# Altium PCB PoHalf-Small.PcbDoc (part 2 of 2)
Units mil, origin at the board's own origin, x right, y up, seen from the top; angles counter-clockwise.
Board outline 2900 x 4650 mil, 2 copper layers (Top Layer, Bottom Layer), stack 33.512 mil thick; 148 components, 103 nets, 556 pads, 176 vias.
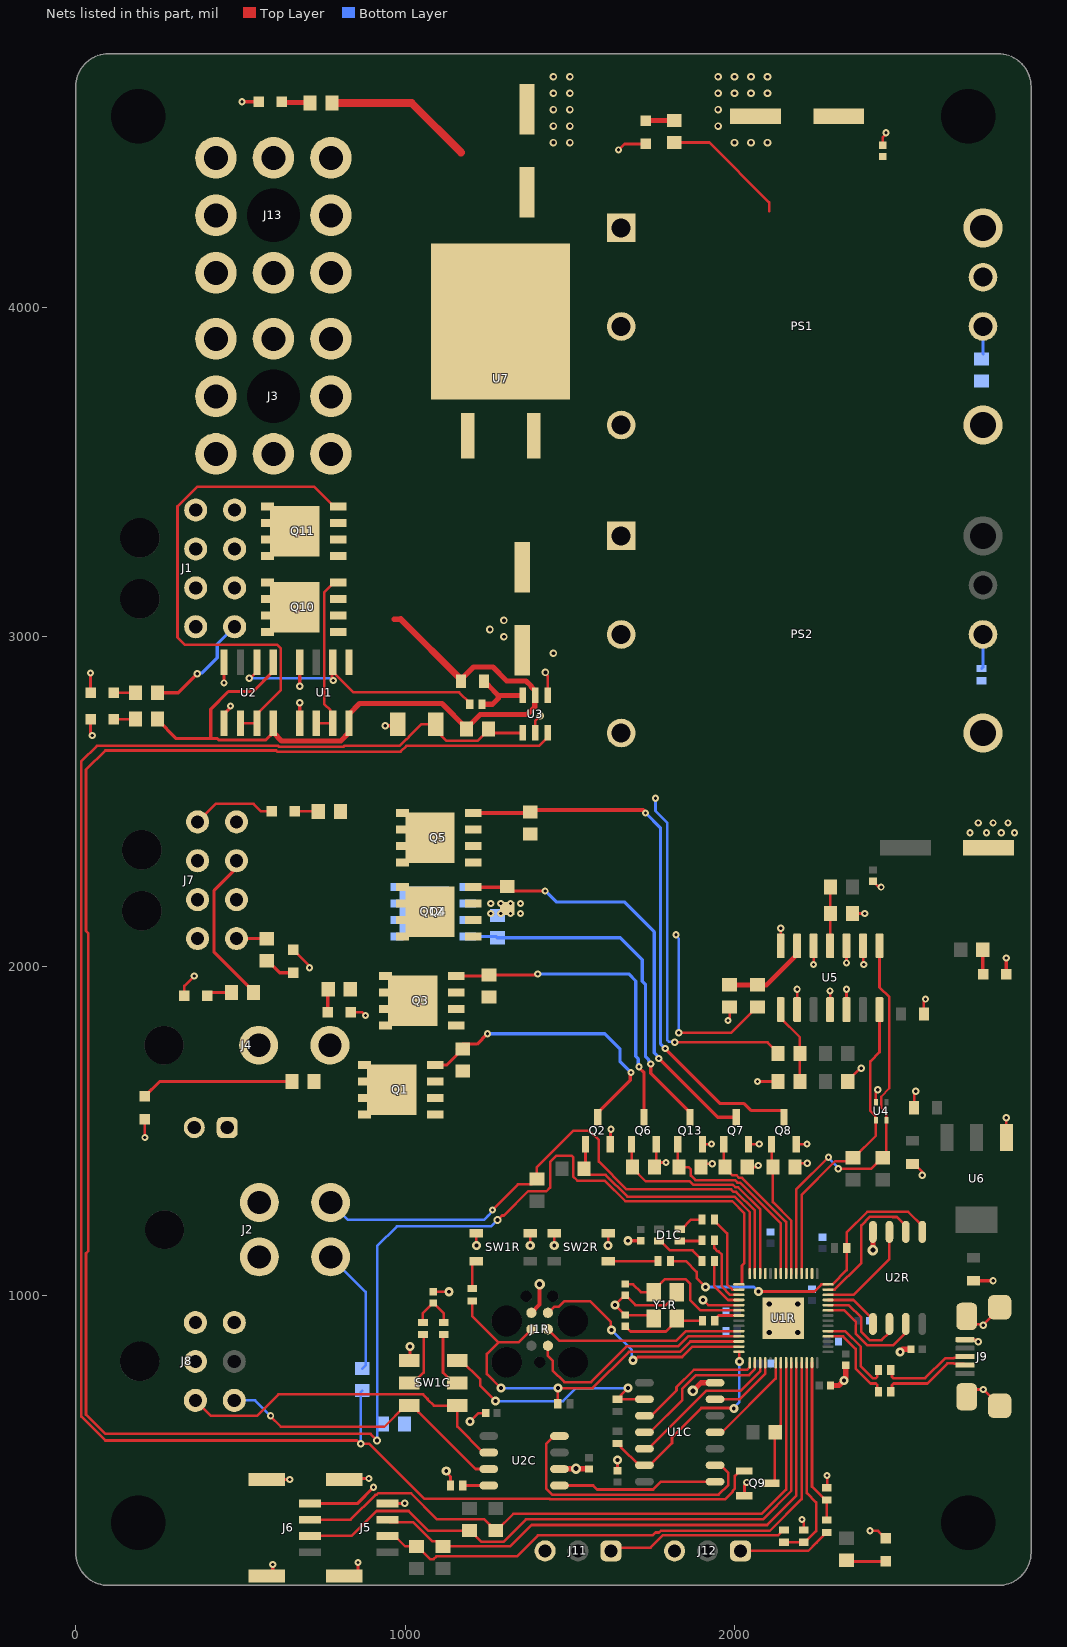
[diagram p2: the nets of this part, all layers, seen from the top]

## Via types
v1: diameter 22, hole 10, Top Layer to Bottom Layer, tented both sides, 85 vias
v2: diameter 27.56, hole 11.81, Top Layer to Bottom Layer, tented both sides, 35 vias
v3: diameter 23, hole 12, Top Layer to Bottom Layer, tented both sides, 28 vias
v4: diameter 31.5, hole 15.75, Top Layer to Bottom Layer, tented both sides, 12 vias
v5: diameter 22.1, hole 10, Top Layer to Bottom Layer, 8 vias
v6: diameter 45.28, hole 27.56, Top Layer to Bottom Layer, tented both sides, 6 vias
v7: diameter 24, hole 12, Top Layer to Bottom Layer, tented both sides, 2 vias

## Nets (pads, with @x,y where several pads share a name; then routed paths per layer and width w, separated by ;. In a path a pad name is that pad's centre, name@x,y a point inside that pad or via, vN(x,y) a via of type N, cw(c..) or ccw(c..) an arc to the next point about the centre after c; other vN are vias at no path point) (continued)
5V_MEAS: R26.2 R30.1 U5.11 | length 179
  Top Layer w7.87: U5.11@2290,2061.65 2290,2238.5 R26.2@2291.5,2240
12V: C7.1 C8.1 J8.6 J10.1 PS1.7 PS1.8 Q1.1 Q1.2 Q1.3 Q3.1 Q3.2 Q3.3 Q4.1 Q4.2 Q4.3 Q5.1 Q5.2 Q5.3 Q12.1 Q12.2 Q12.3 R2.1 R12.1 R13.1 R14.1 R25.1 R44.1 R46.1 | length 963.2
  Top Layer w7.87: R46.1@1817,4500.5 1923.5,4500.5 2105,4319 2105,4292 ; v1(1830.68,1797.83) 1988.83,1797.83 2067.5,1876.5 R25.1@2070,1876.5
  Bottom Layer w7.87: v1(1822.5,2095.55) 1822.5,2091.73 1830.68,2083.54 v1(1830.68,1797.83)
  other v5: 1260,2160 1290,2160 1320,2160 1350,2160 1260,2190 1290,2190 1320,2190 1350,2190
12V_MEAS: R25.2 R29.1 U5.13 | length 268.9
  Top Layer w15: R29.1@1985,1943.5 R25.2@2070,1943.5 2097.44,1943.5 2190,2036.06 U5.13@2190,2061.65
ADC0: DNP1.1 R41.2 U1R.40 | length 634.9
  Top Layer w7.87: R41.2@2150,251.3 DNP1.1@2210,251.3 2213.94,251.3 2248,285.36 2248,372 2219.45,400.55 U1R.40@2219.45,796.28
ADC1: DNP2.1 R42.2 U1R.41 | length 493
  Top Layer w7.87: U1R.41@2235.2,796.28 2235.2,420.31 2276.06,379.45 DNP2.1@2280,379.45 ; R42.2@2279.46,319.25 DNP2.1@2279.46,374.55
AUX_SWITCH: J2.4 R38.2 U1R.13 | length 1775.1
  Top Layer w7.87: v1(1265,1260) 1342.52,1337.52 1384.02,1337.52 R38.2@1400,1353.5 1400,1390 1510,1500 1556.75,1500 1562.51,1494.24 1565.73,1494.24 1588,1471.97 1588,1407 1672.76,1322.24 1989.15,1322.24 1996.65,1314.74 2005.08,1314.74 2061.97,1257.86 U1R.13@2061.97,1066.95
  Bottom Layer w7.87: J2.4@773.94,1282.68 826.42,1230.19 1240.19,1230.19 1251.16,1241.16 1251.16,1242.34 1265,1256.18 v1(1265,1260)
CANCLK_RP2CAN: U1C.6 U1R.32 | length 217.8
  Top Layer w7.87: U1C.6@1940.91,685.16 2015.2,685.16 2093.46,763.42 U1R.32@2093.46,796.28
CANH: J8.4 SW1C.4 U2C.7 | length 932.2
  Top Layer w7.87: v1@590,635 623.11,601.89 936.97,601.89 1000.94,665.87 SW1C.4@1012.76,665.87 1024.57,665.87 1040.32,650.12 1040.32,646.77 1213.54,473.54 U2C.7@1253.9,473.54 U2C.7@1270.63,473.54
  Bottom Layer w7.87: J8.4@481.41,681.89 544.79,681.89 v1(591.68,635)
CANL: J8.1 SW1C.1 U2C.6 | length 1065.1
  Top Layer w8: J8.1@363.29,681.89 410.17,635.02 550.02,635.02 615,700 1054.84,700 1068,686.84 1068,685 1087.13,665.87 SW1C.1@1158.43,665.87 1158.43,602.28 1237.17,523.54 U2C.6@1253.9,523.54 U2C.6@1270.63,523.54
CANRX_RP2CAN: U1C.2 U2C.4 | length 845.6
  Top Layer w7.87: U2C.4@1468.46,573.54 1451.73,573.54 1428.11,549.92 1428.11,413.76 1446.28,395.59 1951.48,395.59 1981.26,425.37 1981.26,461.54 1957.64,485.16 U1C.2@1940.91,485.16
CANTX_RP2CAN: U1C.1 U2C.1 | length 487.4
  Top Layer w7.87: U2C.1@1468.46,423.54 1570.81,423.54 1583.01,411.34 1752.66,411.34 1776.48,435.16 U1C.1@1940.91,435.16
DBG_TX_RP2040: J1R.5 U1R.27 | length 714.8
  Top Layer w7.87: J1R.5@1433.43,947.76 1434.92,947.76 1453.49,966.32 1466.52,966.32 1483.39,983.19 1561.57,983.19 1623.78,920.98 1623.78,898.96 v2(1626.93,895.81) ; v2(1691.89,803.66) 1696.5,803.66 1706.34,813.5 1840.76,813.5 1872.26,845 U1R.27@2013.25,845
  Bottom Layer w7.87: v2(1626.93,895.81) 1688.16,834.58 1688.16,807.39 v2(1691.89,803.66)
GND: C1.2 C1C.2 C1R.2 C2.2 C2C.1 C2R.2 C3.2 C3C.2 C3R.2 C4.2 C4C.2 C4R.2 C5.2 C5C.2 C5R.2 C6.2 C6R.2 C7.2 C7R.2 C8.2 C8R.2 C9.2 C9R.2 C10.2 C10R.2 C11.2 C11R.2 C12R.2 C13R.2 D1.2 D2.2 D3.2 D4.2 D5.2 D6.2 D7.2 D8.2 D9.2 D10.2 D11.2 DNP1.2 DNP2.2 J1.1 J1.2 J1.3 J1.4 J1R.6 J2.1 J2.2 J4.1 J5.4 J5.S1 J5.S2 J6.4 J6.S1 J6.S2 J7.1 J7.2 J7.3 J7.4 J8.2 J9.5 J9.6 J9.7 J9.8 J9.9 J10.2 J11.3 J12.3 J13.1 PS1.2 PS1.3 PS1.4 PS2.2 PS2.3 PS2.4 Q2.2 Q6.2 Q7.2 Q8.2 Q9.2 Q13.2 R6C.2 R15.2 R16.2 R17.2 R19.1 R28.2 R29.2 R30.2 R31.2 R39.2 R40.2 R45.2 SW1C.6 SW1R.B1 SW1R.B2 SW2R.B1 SW2R.B2 U1.4 U1.5 U1C.7 U1R.19 U1R.57 U2.4 U2.5 U2C.2 U2R.4 U3.2 U3.4 U4.4 U5.2 U5.4 U5.5 U5.9 U5.10 U5.12 U5.14 U6.1 Y1R.2 Y1R.4 | length 5001.6
  Top Layer w7.87: D5.2@45,2750 45,2708.82 50,2703.82 v1(50,2700) ; v1(210,1480) D1.2@210,1535 ; D8.2@330,1910 330,1940 v1(360,1970) ; J7.4@370,2438.11 424.89,2493 540,2493 563,2470 D9.2@595,2470 ; D10.2@660,2050 710,2000 v1@710,1990 ; D7.2@835,1860 870,1860 v1(880,1850) ; SW1C.6@1012.76,803.66 1014.72,805.63 v2(1014.72,845) ; C2C.1@1085.59,1011.73 v2(1132.83,1011.73) ; v2(1124.96,467.05) 1124.96,462.91 1137.76,450.12 R6C.2@1137.76,423.54 ; v2(1196.45,617.27) 1222.14,642.96 1244.02,642.96 C3C.2@1244.49,643.43 ; v2(1216.5,1152.09) SW1R.B2@1216.5,1189.49 ; v2(1379.88,1152.09) 1379.88,1185.63 SW1R.B1@1380,1185.75 ; U3.2@1395,2708 1395,2745 v1(1410,2760) ; v3(1426,2892) 1426,2887.91 1432.4,2881.51 U3.4@1432.4,2822 ; v2(1452.72,1152.09) SW2R.B2@1452.72,1189.49 ; v2(1616.1,1152.09) SW2R.B1@1616.1,1189.49 ; v1(1648,4478) 1666,4496 D11.2@1730,4496 ; R15.2@1757,1390 R15.2@1762.5,1395.5 ; Q6.2@1762.5,1459 R15.2@1762.5,1395.5 ; v1(1792,1404) 1771,1404 R15.2@1762.5,1395.5 ; R45.2@1898.5,1390 1908.5,1400 v1(1932.63,1400) ; Q13.2@1902.5,1459 1929,1459 v1(1930,1460) ; v2(1904.49,986.73) 1920.24,970.98 U1R.19@2013.25,970.98 ; v1(1980,1835) 1980,1838.28 1985,1843.28 R29.2@1985,1876.5 ; R16.2@2028.5,1390 2063.18,1390 2068.18,1395 v1(2072,1395) ; Q7.2@2042.5,1459 2043.5,1460 v1(2075,1460) ; v1(2070,1650) R28.2@2131.5,1650 ; U1R.57@2101.34,970.98 v4(2105.28,974.92) ; U5.14@2140,2061.65 v1(2140,2115) ; R17.2@2173.5,1390 2185.5,1402 v1(2221,1402) ; Q8.2@2182.5,1459 2219,1459 v1(2220,1460) ; U5.2@2190,1868.35 v1(2190,1930) ; v1(2205,320) 2210,315 DNP1.2@2210,288.7 ; v1(2240,2005) U5.12@2240,2061.65 ; DNP2.2@2280,416.85 2281,417.85 v1(2281,454) ; U5.4@2290,1868.35 v1(2290,1925) ; U5.5@2340,1868.35 v1(2340,1930) ; v1(2340,2010) U5.10@2340,2061.65 ; R31.2@2343.5,1650 2343.5,1652.5 2381,1690 v1(2385,1690) ; R30.2@2358.5,2160 v1(2395,2160) ; U5.9@2390,2061.65 2391.06,2060.59 2391.06,2006.06 v1(2392.13,2005) ; v1(2411,286) 2436,286 D3.2@2459,263 ; C11.2@2420,2257.87 2420.79,2257.87 2427.87,2250.79 2427.87,2250 2435.17,2242.7 2442.3,2242.7 v1(2445,2240) ; U4.4@2429.25,1587.56 2429.25,1615.97 2435,1621.72 v1(2435,1625) ; C8.2@2450,4492.13 2450,4516.85 2460,4526.85 v1(2460,4530) ; C2.2@2540,1400 2545,1400 2570,1375 v1(2570,1365) ; C4.2@2545,1570 2545,1611.72 2550,1616.72 v1(2550,1620) ; C3.2@2575,1855 2575,1891.72 2580,1896.72 v1(2580,1900) ; J9.5@2699.68,866.18 2733.82,866.18 v1(2740,860) ; J9.6@2704.61,692.95 2726.46,714.8 2754.8,714.8 v1(2755,715) 2756.18,715 2805,666.18 J9.9@2805,665.39 ; J9.7@2704.61,937.05 2728.96,912.7 2752.3,912.7 v1(2755,910) 2755,911.32 2805,961.32 J9.8@2805,964.61 ; v1(2825,1540) 2825,1480.55 U6.1@2825.55,1480
  Top Layer w8: SW1R.B1@1377.32,1188.43 SW1R.B1@1380,1185.75 ; v2(1636.77,970.98) v2@1637.36,970.98 ; C1C.2@1644.65,466.3 C1C.2@1644.65,468.43 v2(1644.65,501.3) ; Y1R.2@1754.88,930.35 1744.37,940.87 C2R.2@1668.27,940.87 1667.48,940.87 v2@1637.36,970.98 ; Y1R.4@1824.88,1010.35 1824.88,1004.45 1791.35,970.92 1699.24,970.92 1669.06,1001.1 C1R.2@1668.27,1001.1 1667.48,1001.1 v2@1637.36,970.98
  Top Layer w9.84: v2(1676.14,1166.46) C5C.2@1715.51,1166.46
  Top Layer w10: v1(45,2890) D6.2@45,2830 D6.2@46,2831 ; U2.5@450,2737 450,2765 467.7,2782.7 467.7,2787.7 v1(470,2790) ; v1(450,2860) U2.4@450,2923 ; v1(505,4624) D2.2@555,4624 ; J6.S2@580,148.35 583.31,148.35 598,163.03 v1(598,184) ; J6.S1@580,441.65 580.35,442 v1(650,442) ; U1.5@680,2737 v1(680,2800) ; v1(680,2850) U1.4@680,2923 ; J6.4@711.89,368.82 854.82,368.82 v1(904,418) ; J5.S2@815,148.35 842.31,148.35 857,163.03 v1(857,190) ; J5.S1@815,441.65 818.35,445 v1(890,445) ; v1(940,2730) 972.52,2730 C1.2@977.52,2735 C1.2@982.52,2740 ; J5.4@946.89,368.82 997.82,368.82 v1(999,370) ; Q2.2@1622.5,1459 1623.75,1460.25 1623.75,1503.75 v1(1625,1505) ; Q9.2@2030,392.5 2030,422.75 2037,429.75 v1(2037,433) ; C5.2@2725,1045 v1(2785,1045) ; D4.2@2825,1975 v1(2825,2025)
  Top Layer w11.81: J1R.6@1383.43,947.76 1408.34,972.67 v4(1408.34,1034.3)
  Top Layer w15.75: U2C.2@1468.46,473.54 1469.15,474.23 1517.97,474.23 v4(1518.66,474.92) 1519.35,474.23 1557.34,474.23 C4C.2@1558.03,473.54 ; v4(1873.52,710.61) 1898.07,735.16 U1C.7@1940.91,735.16 ; C10R.2@2291.69,726.89 2291.92,726.66 2316.66,726.66 v2(2332.64,742.64) 2332.64,745.83 2337.56,750.76 C4R.2@2337.56,788.5 ; v4(2420.04,1138.21) U2R.4@2420.04,1193.48 ; v2(2502.91,829.25) 2510.79,837.13 C3R.2@2535.79,837.13
  other v1: 710,1995 2715,2405 2765,2405 2810,2405 2850,2405 2740,2435 2785,2435 2830,2435
  other v3: 1450,2950 1300,3000 1257,3022 1300,3050 1450,4500 1500,4500 2000,4500 2050,4500 2100,4500 1450,4550 1500,4550 1950,4550 1450,4600 1500,4600 1950,4600 1450,4650 1500,4650 1950,4650 2000,4650 2050,4650 2100,4650 1450,4700 1500,4700 1950,4700 2000,4700 2050,4700 2100,4700
  other v4: 2105.28,888.31 2191.89,888.31 2191.89,974.92
INT_RP2CAN: U1C.4 U1R.34 | length 297.2
  Top Layer w7.87: U1C.4@1940.91,585.16 1961.9,585.16 2124.96,748.22 U1R.34@2124.96,793.82
KILL_FEEDBACK: Q9.3 R18.2 U1R.35 | length 378.2
  Top Layer w7.87: Q9.3@2112,430 2122,440 2122,589.42 2140.71,608.13 U1R.35@2140.71,796.28
KILL_SWITCH: J2.3 R23.2 | length 386.9
  Bottom Layer w7.87: J2.3@773.94,1117.32 880,1011.26 880,788.5 R23.2@870,778.5
LEDB_RP2CAN: R8C.1 U1R.18 | length 168.1
  Top Layer w7.87: R8C.1@1938.94,1104.84 1938.94,1028.19 1980.39,986.73 U1R.18@2013.25,986.73
LEDG_RP2CAN: R7C.1 U1R.17 | length 213.3
  Top Layer w7.87: R7C.1@1938.94,1167.83 1938.94,1144.21 1948.79,1134.36 1951.72,1134.36 1961.57,1124.5 1961.57,1027.82 1986.91,1002.48 U1R.17@2013.25,1002.48
LEDR_RP2CAN: R5C.1 U1R.16 | length 255
  Top Layer w7.87: R5C.1@1938.94,1230.83 1938.94,1226.89 1977.32,1188.5 1977.32,1034.34 1993.44,1018.23 U1R.16@2013.25,1018.23
MISO_RP2CAN: U1C.12 U1R.31 | length 475
  Top Layer w7.87: U1C.12@1726.34,535.16 1738.81,535.16 1915.19,711.54 2019.31,711.54 2077.72,769.95 U1R.31@2077.72,796.28
MOSI_RP2CAN: U1C.11 U1R.30 | length 454.6
  Top Layer w7.87: U1C.11@1726.34,585.16 1743.07,585.16 1841.5,683.58 1841.5,717.56 1882.71,758.78 2044.28,758.78 2061.97,776.47 U1R.30@2061.97,796.28
MOTOR_EN: R20.1 R21.2 U3.6 | length 204.1
  Top Layer w15.75: R21.2@1233.7,2795 1265,2795 1283,2813 1283,2822 ; R20.1@1240,2865 1240,2860 1247.13,2852.87 1252.13,2852.87 1283,2822 ; U3.6@1357.6,2822 1283,2822
mOTOR_PWR: J1.5 J1.6 J1.7 J1.8 Q10.D Q11.D R8.1 | length 341.5
  Top Layer w10: R8.1@248.5,2830 311,2830 v1(369,2888)
  Bottom Layer w10: v1(369,2888) 371.3,2890.3 384.3,2890.3 430.06,2936.06 430.06,2978.01 J1.5@482.41,3030.35
nCS_RP2CAN: R4C.2 U1C.13 U1R.28 | length 646.2
  Top Layer w7.87: R4C.2@1644.65,550.71 1648.58,550.71 1655.47,543.82 1655.47,539.29 1709.61,485.16 U1C.13@1726.34,485.16 1743.07,485.16 1810.26,552.35 1810.26,569.67 1899.37,658.78 1996.22,658.78 v2(1997.78,657.22) ; U1R.28@2013.25,829.25 2014.72,829.25 v2(2014.72,800.12)
  Bottom Layer w7.87: v2(1997.78,657.22) 1997.78,659.52 2014.72,676.47 v2(2014.72,800.12)
NetC1_1: C1.1 Q9.1 R22.2 R23.1 U3.1 | length 5784.6
  Top Layer w7.87: C1.1@1072.8,2703.11 1089.98,2720.3 C1.1@1092.48,2722.8 ; C1.1@1092.48,2717.8 1126.28,2684 1220,2684 1253.5,2717.5 R22.2@1253.5,2720 1265.5,2708 U3.1@1357.6,2708 ; C1.1@1092.48,2735 1049.61,2735 1011.38,2696.77 1011.38,2694.93 1005.38,2688.94 1003.54,2688.94 983.61,2669 815.61,2669 812.33,2665.72 617.67,2665.72 614.39,2669 64,2669 17.24,2622.24 17.24,632.71 89.96,560 853.32,560 863.32,550 891.33,550 1058.33,383 1167.52,383 1168.26,383.74 1438.09,383.74 1440.41,381.42 1971.42,381.42 1994.76,404.76 1994.76,407.74 2000.76,413.74 2000.76,452.26 2016,467.5 Q9.1@2030,467.5
  Bottom Layer w7.87: v1(865,550) 865,706.5 R23.1@870,711.5
NetC2C_2: C2C.2 R2C.2 R3C.2 | length 144.3
  Top Layer w7.87: R3C.2@1054.09,918.82 1054.09,946.77 1084.8,977.48 C2C.2@1085.59,977.48 1086.38,977.48 1117.09,946.77 R2C.2@1117.09,918.82
NetC2R_1: C2R.1 R1R.2 Y1R.3 | length 263.4
  Top Layer w8: C2R.1@1668.27,906.61 1669.06,906.61 1684.75,890.92 1791.35,890.92 1824.88,924.45 Y1R.3@1824.88,930.35 1831.5,923.74 R1R.2@1902.6,923.74
NetD1_1: D1.1 R1.1 | length 465.1
  Top Layer w9.84: D1.1@210,1605 255,1650 R1.1@656.5,1650
NetD1C_1: D1C.1 R5C.2 | length 80.1
  Top Layer w7.87: D1C.1@1833.62,1201.3 1838.54,1201.3 1868.07,1230.83 R5C.2@1901.54,1230.83
NetD1C_2: D1C.2 R7C.2 | length 68.7
  Top Layer w7.87: D1C.2@1833.62,1165.87 1899.57,1165.87 R7C.2@1901.54,1167.83
NetD1C_3: D1C.3 R8C.2 | length 158.5
  Top Layer w7.87: D1C.3@1770.63,1165.87 1775.55,1165.87 1804.09,1137.32 1872.99,1137.32 1901.54,1108.78 R8C.2@1901.54,1104.84
NetD2_1: D2.1 R4.2 | length 82.5
  Top Layer w16: D2.1@627,4622 R4.2@709.5,4622
NetD3_1: D3.1 R3.1 | length 120.4
  Top Layer w9.84: R3.1@2340,196.5 2343.5,193 D3.1@2459,193
NetD4_1: D4.1 R6.2 | length 75.6
  Top Layer w9.84: R6.2@2753.5,2050 2753.5,1976.5 D4.1@2755,1975
NetD5_1: D5.1 R7.2 | length 66.5
  Top Layer w7.87: D5.1@115,2750 R7.2@181.5,2750
NetD6_1: D6.1 R8.2 | length 66.5
  Top Layer w7.87: D6.1@115,2830 R8.2@181.5,2830
NetD7_1: D7.1 R9.1 | length 70.6
  Top Layer w10: D7.1@765,1860 765,1928.5 R9.1@766.5,1930
NetD8_1: D8.1 R10.1 | length 77.1
  Top Layer w10: D8.1@400,1910 410,1920 R10.1@473,1920
NetD9_1: D9.1 R11.1 | length 71.5
  Top Layer w7.87: D9.1@665,2470 R11.1@736.5,2470
NetD10_1: D10.1 R43.1 | length 95.1
  Top Layer w10: R43.1@580,2016.5 582.5,2016.5 619,1980 D10.1@660,1980
NetD11_1: D11.1 R46.2 | length 87.6
  Top Layer w15: D11.1@1730,4566 1730.75,4566.75 1816.25,4566.75 R46.2@1817,4567.5
NetPS1_6: PS1.6 R39.1 | length 103.8
  Bottom Layer w7.87: PS1.6@2754.21,3961.97 2754.21,3859.29 R39.1@2755,3858.5
NetPS2_6: PS2.6 R40.1 | length 125
  Bottom Layer w7.87: R40.1@2750,2903.7 2754.21,2907.91 PS2.6@2754.21,3026.97
NetQ1_4: Q1.4 Q2.3 R2.2 | length 911.5
  Top Layer w10: Q1.4@1099,1707 Q1.4@1092,1700 1126.5,1700 1157.5,1731 1157.5,1733.5 1172.5,1748.5 R2.2@1175,1748.5 ; R2.2@1157.5,1748.5 1160,1748.5 1175,1763.5 1218.5,1763.5 v1(1250,1795) ; Q2.3@1585,1541 1585,1555 1683.7,1653.7 1683.7,1674.7 v1(1686,1677)
  Bottom Layer w10: v1(1250,1795) 1606.54,1795 1652.12,1749.42 1652.12,1710.88 v1(1686,1677)
NetQ3_4: Q3.4 Q6.3 R12.2 | length 981.1
  Top Layer w10: Q3.4@1155,1970 1251.5,1970 R12.2@1255,1973.5 1392.86,1973.5 1393.89,1974.53 1400.96,1974.53 v1(1402.87,1976.44) ; v1(1710,1695) 1710,1691.75 1725.29,1676.46 1725.29,1541.29 Q6.3@1725,1541
  Bottom Layer w10: v1(1402.87,1976.44) 1678.56,1976.44 1700,1955 1700,1726 1707.7,1718.3 1707.7,1697.3 v1(1710,1695)
NetQ4_4: Q4.4 Q7.3 R13.2 | length 1305.4
  Top Layer w10: Q4.4@1207.5,2240 1308,2240 R13.2@1310,2242 1323.5,2228.5 v1(1425,2228.5) ; v1(1770,1720) 1949,1541 Q7.3@2005,1541
  Bottom Layer w10: v1(1425,2228.5) 1458.5,2195 1665,2195 1756.13,2103.87 1756.13,1737.12 1770,1723.25 v1(1770,1720)
NetQ5_4: Q5.4 Q8.3 R14.2 | length 1722.1
  Top Layer w10: v1(1790,1750) 1957,1583 2029,1583 2049.94,1562.06 2142.94,1562.06 2150,1555 Q8.3@2150,1541
  Top Layer w12: Q5.4@1207.5,2465 1376.5,2465 R14.2@1380,2468.5 ; R14.2@1380,2473.5 1721.5,2473.5 v1(1730,2465)
  Bottom Layer w10: v1(1730,2465) 1775,2420 1775,1765 v1(1790,1750)
NetQ10_4: Q10.4 U1.6 U1.7 | length 513.6
  Top Layer w7.87: U1.6@730,2737 U1.7@780,2737 772.94,2744.06 772.94,2777.06 755,2795 755,3135.5 784.5,3165 Q10.4@797.5,3165
NetQ11_4: Q11.4 U2.6 U2.7 | length 1571.2
  Top Layer w7.87: U2.6@500,2737 U2.7@550,2737 550,2765 623,2838 623,2964.48 611.48,2976 331,2976 309,2998 309,3395.59 368.41,3455 724.5,3455 784.5,3395 Q11.4@797.5,3395
NetQ12_4: Q12.4 Q13.3 R44.2 | length 1098.1
  Top Layer w10: v1(1745.31,1703.19) 1745.31,1674.69 1865,1555 Q13.3@1865,1541
  Bottom Layer w10: Q12.4@1190,2090 1276.5,2090 R44.2@1280,2086.5 1653.5,2086.5 1720,2020 1720,1954.15 1730,1944.15 1730,1724.81 1739.4,1715.41 1739.4,1712.34 1745.31,1706.43 v1(1745.31,1703.19)
NetR2C_1: R2C.1 SW1C.2 | length 172.3
  Top Layer w7.87: R2C.1@1117.09,881.42 1115.12,879.45 1115.12,766.26 1146.61,734.76 SW1C.2@1158.43,734.76
NetR3C_1: R3C.1 SW1C.5 | length 172.3
  Top Layer w7.87: SW1C.5@1012.76,734.76 1024.57,734.76 1056.06,766.26 1056.06,879.45 R3C.1@1054.09,881.42
NetR6C_1: R6C.1 U2C.8 | length 78.7
  Top Layer w7.87: R6C.1@1175.16,423.54 U2C.8@1253.9,423.54
NetR6R_1: R6R.1 SW1R.A2 | length 91.3
  Top Layer w7.87: R6R.1@1203.7,1021.18 1203.7,1095.98 1212.56,1104.84 SW1R.A2@1216.5,1104.84
NetR7R_1: R7R.1 SW2R.A1 | length 151.6
  Top Layer w7.87: SW2R.A1@1616.1,1104.84 R7R.1@1767.68,1104.84
NetR21_1: R21.1 U1.2 U2.2 | length 836.3
  Top Layer w7.87: v1(526.88,2873.79) 528.79,2873.79 550,2895 U2.2@550,2923 ; U1.2@780,2923 U1.2@780,2895 ; v1(782,2867) 782,2870.73 778.04,2874.69 778.04,2893.04 U1.2@780,2895 ; R21.1@1196.3,2795 1196.3,2798.94 1164.24,2831 844,2831 U1.2@780,2895
  Bottom Layer w7.87: v1(526.88,2873.79) 771.38,2873.79 778.18,2867 v1(782,2867)
NetU1R_2: U1R.2
NetU1R_3: U1R.3
NetU1R_9: U1R.9
NetU1R_11: U1R.11
Orin_PWR: J4.2 Q1.D R1.2
Orin_SW: Q2.1 R5.2 U1R.14 | length 815.2
  Top Layer w7.87: R5.2@1543.5,1385 1543.5,1382.5 1559.56,1366.44 1608.52,1366.44 1674.39,1300.57 1999.21,1300.57 2046.22,1253.56 U1R.14@2046.22,1066.95
  Top Layer w10: R5.2@1547.5,1389 Q2.1@1547.5,1459
Pump_PWR: J7.5 Q12.D R43.2 | length 92
  Top Layer w10: J7.5@488.11,2083.78 579.72,2083.78 R43.2@580,2083.5
Pump_SW: Q13.1 R45.1 U1R.8 | length 613.8
  Top Layer w7.87: Q13.1@1827.5,1459 1827.5,1394 R45.1@1831.5,1390 1860.16,1390 1867.21,1382.95 1867.21,1364.31 1880.93,1350.59 2000.89,1350.59 2008.39,1343.09 2016.82,1343.09 2140.71,1219.2 U1R.8@2140.71,1066.95
QSPI_SCLK_RP2040: U1R.52 U2R.6 | length 286.6
  Top Layer w7.87: U1R.52@2283.92,970.98 2346.61,970.98 2384.8,932.8 2384.8,890.14 2410.25,864.69 2446.42,864.69 2470.04,888.31 U2R.6@2470.04,909.96
QSPI_SD0_RP2040: U1R.53 U2R.5 | length 178.4
  Top Layer w7.87: U1R.53@2283.92,986.73 2361.18,986.73 2420.04,927.87 U2R.5@2420.04,909.96
QSPI_SD1_RP2040: U1R.55 U2R.2 | length 427.3
  Top Layer w7.87: U1R.55@2283.92,1018.23 2303.73,1018.23 2384.8,1099.3 2384.8,1213.31 2410.25,1238.76 2479.82,1238.76 2479.88,1238.7 2492.48,1238.7 2520.04,1211.14 U2R.2@2520.04,1189.49
QSPI_SD2_RP2040: U1R.54 U2R.3 | length 309.4
  Top Layer w7.87: U1R.54@2283.92,1002.48 2361.18,1002.48 2470.04,1111.34 U2R.3@2470.04,1189.49
QSPI_SD3_RP2040: U1R.51 U2R.7 | length 339.2
  Top Layer w7.87: U1R.51@2283.92,955.24 2333.4,955.24 2368.56,920.07 2368.56,884.11 2403.73,848.94 2480.67,848.94 2520.04,888.31 U2R.7@2520.04,909.96
QSPI_SS_RP2040: R5R.2 R7R.2 U1R.56 U2R.1 | length 1007.5
  Top Layer w7.87: R7R.2@1805.08,1104.84 1852.03,1104.84 1885.24,1071.64 1885.24,1053.23 v2(1912.36,1026.1) ; v2(2073.14,1012.32) 2242.45,1012.32 2264.11,1033.98 U1R.56@2283.92,1033.98 ; U1R.56@2297.2,1033.98 2340.51,1077.28 R5R.2@2340.51,1144.21 2340.51,1191.29 2403.73,1254.51 2526.68,1254.51 2570.04,1211.14 U2R.1@2570.04,1189.49
  Bottom Layer w7.87: v2(1912.36,1026.1) 2058.69,1026.1 2072.46,1012.32 v2(2073.14,1012.32)
RUN_RP2040: J1R.4 R4R.2 R6R.2 U1R.26 | length 1275.3
  Top Layer w7.87: R6R.2@1203.7,983.78 1203.7,937.88 1283.39,858.19 ; v2(1291.64,719.02) 1290.31,719.02 1247.99,761.34 1247.99,822.79 1283.39,858.19 ; J1R.4@1383.43,897.76 1343.86,858.19 1283.39,858.19 ; R4R.2@1463.54,671.77 v2(1463.54,719.02) 1569.09,719.02 1679.32,829.25 1834.24,829.25 1865.73,860.75 U1R.26@2013.25,860.75
  Bottom Layer w7.87: v2(1291.64,719.02) v2(1463.54,719.02)
SCK_RP2CAN: U1C.10 U1R.29 | length 400.1
  Top Layer w7.87: U1C.10@1726.34,635.16 1746.58,635.16 1823.96,712.53 1823.96,722.29 1876.19,774.53 2037.76,774.53 2046.22,782.99 U1R.29@2046.22,796.28
SCL_0_1: J6.2 R33.2 U1R.37 | length 1983.4
  Top Layer w7.87: J6.2@711.89,270.39 837.93,270.39 913.53,346 1010.51,346 1070.01,286.5 R33.2@1195,286.5 1197.5,286.5 1231.33,252.67 1298.15,252.67 1366.48,321 2086.04,321 2172.2,407.16 U1R.37@2172.2,796.28
SCL_1: J5.2 R35.2 U1R.39 | length 1775.2
  Top Layer w7.87: J5.2@946.89,270.39 968.54,270.39 1000.44,238.5 R35.2@1035,238.5 1037.5,238.5 1075.76,200.24 1086.76,200.24 1094.79,208.26 1339.26,208.26 1403,272 1751.59,272 1760.3,280.7 1770.66,280.7 1776.13,286.17 2107.41,286.17 2203.7,382.47 U1R.39@2203.7,796.28
SCL_1_0: R37.2 U1R.5 U4.2 U5.8 | length 1266.8
  Top Layer w6.3: 2460.75,1554.48 2445.3,1569.93 2445.3,1604.15 2470,1628.85
  Top Layer w7.87: U1R.5@2187.95,1066.95 2187.95,1322.95 v1(2285,1420) ; v1(2315,1385) 2414,1385 2447.5,1418.5 R37.2@2450,1418.5 ; U5.8@2440,2061.65 2440,1935.85 2470,1905.85 2470,1628.85 ; R37.2@2451,1417.5 2460.75,1427.25 U4.2@2460.75,1532.44 2460.75,1554.48
  Bottom Layer w7.87: v1(2285,1420) 2285,1417.5 2315,1387.5 v1(2315,1385)
SDA_0_1: J6.3 R32.2 U1R.36 | length 1960.4
  Top Layer w7.87: J6.3@711.89,319.61 834.61,319.61 910.19,395.19 913.45,395.19 918.26,400 1017.96,400 1096.96,321 1240.5,321 1256.44,305.06 1256.44,302.56 1272.5,286.5 R32.2@1275,286.5 ; R32.2@1277.5,286.5 1328.26,337.26 2082.26,337.26 2156.46,411.46 U1R.36@2156.46,796.28
SDA_1: J5.3 R34.2 U1R.38 | length 1742.2
  Top Layer w7.87: J5.3@946.89,319.61 954.76,311.73 1024.73,311.73 1081.9,254.56 1098.94,254.56 R34.2@1115,238.5 1318.5,238.5 1383.58,303.58 2099.01,303.58 2187.95,392.52 U1R.38@2187.95,796.28
SDA_1_0: R36.2 U1R.4 U4.1 U5.7 | length 940.5
  Top Layer w7.87: U1R.4@2203.7,1066.95 2203.7,1305.96 2305.55,1407.81 2349.31,1407.81 R36.2@2360,1418.5 2362.5,1418.5 2429.25,1485.25 U4.1@2429.25,1532.44 2427.28,1534.41 2427.28,1545.72 2412.19,1560.81 2412.19,1711.31 2440,1739.12 U5.7@2440,1868.35
Sens_0: J11.1 R41.1 | length 548.8
  Top Layer w7.87: J11.1@1625,235 1745,235 1782,272 2132,272 2139.17,279.17 2139.17,281.81 2146.06,288.7 R41.1@2150,288.7
Sens_1: J12.1 R42.1 | length 287.7
  Top Layer w7.87: J12.1@2018,225 2223.77,225 2249.09,250.32 2249.09,250.39 2269.17,270.47 2269.17,274.41 2276.06,281.3 R42.1@2280,281.3
SOFTWARE_KILL: R19.2 U1R.15 U3.3 | length 6531.4
  Top Layer w7.87: v7(915,560) 895,580 90,580 31.42,638.58 31.42,1128.04 38,1134.62 38,2100.38 31.42,2106.96 31.42,2596.42 89.83,2654.83 608.52,2654.83 611.8,2651.54 986.19,2651.54 1003.65,2669 1406.9,2669 1432.4,2694.5 U3.3@1432.4,2703 ; v7(1280,1230) 1281.15,1230 1294.27,1243.12 1299.65,1243.12 1373.26,1316.74 1428.86,1316.74 1440,1327.88 1440,1405.48 1459.52,1425 1505.39,1425 1510,1420.39 1510,1361.52 1522.52,1349 1605.91,1349 1668.51,1286.4 1993.34,1286.4 2029.46,1250.28 2029.46,1098.06 2022.6,1091.2 2022.6,1033.98 U1R.15@2013.25,1033.98
  Bottom Layer w7.87: v7(915,560) 915,1150 975,1210 1260,1210 v7(1280,1230)
Solinoid_1_PWR: J7.8 Q5.D R11.2
Solinoid_1_SW: Q8.1 R17.1 U1R.6 | length 416.8
  Top Layer w7.87: Q8.1@2112.5,1459 2112.5,1394 R17.1@2116.5,1390 2116.5,1283.5 2172.2,1227.8 U1R.6@2172.2,1066.95
Solinoid_2_PWR: J7.7 Q4.D R10.2 | length 477.9
  Top Layer w10: J7.7@488.11,2320 476.63,2308.52 476.63,2286.63 420,2230 420,2042.5 540,1922.5 R10.2@540,1920
Solinoid_2_SW: Q7.1 R16.1 U1R.7 | length 482.6
  Top Layer w7.87: Q7.1@1967.5,1459 1967.5,1391.5 1994.24,1364.76 2006.76,1364.76 2014.26,1357.26 2022.69,1357.26 2156.46,1223.5 U1R.7@2156.46,1066.95
Solinoid_3_PWR: J7.6 Q3.D R9.2
Solinoid_3_SW: Q6.1 R15.1 U1R.12 | length 707.4
  Top Layer w7.87: Q6.1@1687.5,1459 1687.5,1392.5 R15.1@1690,1390 1690,1387.5 1730.5,1347 1864.48,1347 1875.06,1336.42 1995.02,1336.42 2002.52,1328.92 2010.95,1328.92 2077.72,1262.15 U1R.12@2077.72,1066.95
SWCLK_RP2040: J1R.3 U1R.24 | length 606.9
  Top Layer w7.87: J1R.3@1433.43,897.76 1468.86,862.32 1822.76,862.32 1852.69,892.24 U1R.24@2013.25,892.24
SWDIO_RP2040: J1R.1 U1R.25 | length 718.6
  Top Layer w7.87: J1R.1@1433.43,847.76 1433.43,817.21 1447.99,802.65 1447.99,772.72 1483.39,737.32 1564.64,737.32 1673.89,846.57 1829.29,846.57 1859.21,876.5 U1R.25@2013.25,876.5
TERM_DET_RP2CAN: R1C.2 SW1C.3 U1C.9 | length 723.9
  Top Layer w7.87: SW1C.3@1158.43,803.66 1170.24,803.66 1228.5,745.4 1228.5,725.72 v2(1274.57,679.65) ; R1C.2@1644.65,685.16 R1C.2@1648.58,685.16 ; v2(1676.14,719.02) 1655.47,698.35 1655.47,692.05 R1C.2@1648.58,685.16 ; U1C.9@1726.34,685.16 R1C.2@1648.58,685.16
  Bottom Layer w7.87: v2(1274.57,679.65) 1479.29,679.65 1518.66,719.02 v2(1676.14,719.02)
USB_N: J9.2 R3R.1 | length 272.8
  Top Layer w7.87: R3R.1@2474.37,708.12 2478.09,711.85 2478.09,728.64 2482.7,733.25 2585.3,733.25 2646.32,794.27 2665.54,794.27 2666.47,793.35 2695.75,793.35 J9.2@2699.68,789.41
USB_P: J9.3 R2R.1 | length 272.9
  Top Layer w7.87: R2R.1@2474.37,774.13 2478.09,770.41 2478.09,753.62 2482.7,749 2520,749 2520.13,749.13 2578.73,749.13 2639.74,810.14 2665.54,810.14 2666.47,811.06 2695.75,811.06 J9.3@2699.68,815
USB_RP2040_N: R3R.2 U1R.46 | length 267.4
  Top Layer w7.87: U1R.46@2283.92,876.5 2329.32,876.5 2367.64,838.17 2367.64,778.89 2413.28,733.25 2428.63,733.25 2433.25,728.64 2433.25,711.85 R3R.2@2436.97,708.12
USB_RP2040_P: R2R.2 U1R.47 | length 267.4
  Top Layer w7.87: U1R.47@2283.92,892.24 2335.84,892.24 2383.39,844.69 2383.39,785.42 2419.81,749 2428.63,749 2433.25,753.62 2433.25,770.41 R2R.2@2436.97,774.13
V+: J3.1 Q10.1 Q10.2 Q10.3 Q11.1 Q11.2 Q11.3 R7.1 R20.2 R22.1 U1.1 U1.8 U2.1 U2.8 U3.5 U7.1 U7.3 | length 2317.2
  Top Layer w10: R7.1@248.5,2747.5 305,2691 410,2691 ; U2.8@600,2709 577.7,2686.7 434.32,2686.7 430.02,2691 410,2691 ; U2.1@600,2923 600,2895 538.82,2833.82 463.82,2833.82 410,2780 410,2691
  Top Layer w15.75: U2.8@600,2737 600,2709 625.17,2683.83 804.83,2683.83 830,2709 830,2765 862,2797 1112,2797 R22.1@1186.5,2722.5 ; 967,3053 987,3053 ; R20.2@1170,2865 1170,2870 1208,2908 1266.42,2908 1308.42,2866 1367.14,2866 1381.77,2851.37 1381.77,2848.73 1392.87,2837.63 1392.87,2824.13 U3.5@1395,2822 1393.79,2820.79 1393.79,2787.79 1369.9,2763.9 1227.9,2763.9 R22.1@1186.5,2722.5 ; R22.1@1186.5,2720 R22.1@1186.5,2722.5
  Top Layer w20: 987,3053 R20.2@1170,2870
Vreg: C6.1 C9.1 J8.3 PS1.1 PS2.1 R4.1 R24.1 U7.2 | length 1557
  Top Layer w7.87: v1(1818.87,1768.75) 2100.25,1768.75 2131.5,1737.5 R24.1@2131.5,1735
  Top Layer w23.62: R4.1@778.5,4620 1020,4620 1170,4470
  Bottom Layer w7.87: v1(1760,2510) 1760,2471.09 1796.06,2435.03 1796.06,1775.15 1800.68,1770.54 1817.09,1770.54 v1(1818.87,1768.75)
Vreg_MEAS: R24.2 R28.1 U5.1 | length 242.6
  Top Layer w7.87: U5.1@2140,1868.35 2140,1842.76 2198.5,1784.26 R24.2@2198.5,1735 R28.1@2198.5,1650
XIN_RP2040: C1R.1 U1R.20 Y1R.1 | length 443.1
  Top Layer w7.87: C1R.1@1668.27,1035.35 1669.55,1034.07 1691.89,1034.07 1715.61,1010.35 Y1R.1@1754.88,1010.35 1754.88,1016.26 1788.35,1049.72 1851.43,1049.72 1865.12,1036.03 1865.12,986.73 1896.61,955.24 U1R.20@2013.25,955.24
XOUT_RP2040: R1R.1 U1R.21 | length 82.1
  Top Layer w7.87: R1R.1@1940,923.74 1940,927.68 1951.81,939.49 U1R.21@2013.25,939.49
pads on no net: J1.9 J1.10 J1R.A J1R.B J1R.C J1R.D J1R.E J1R.F J1R.G J2. J3.8 J4. J7.9 J7.10 J8.7 J9.1 J9.4 J13.8 SW1R.A1 SW2R.A2 U1.3 U1C.3 U1C.5 U1C.8 U2.3

## Polygon pours and split planes (outlines as drawn)
12V on Bottom Layer "NONET_L-01_P-001" (solid, remove dead copper, pour order 1): 1158.03,2120.13 1336.89,2120.13 1360.72,2143.96 1360,2144.68 1360,2230 1330.13,2259.87 1157.13,2259.87
Pump_PWR on Bottom Layer "NONET_L-01_P-001" (solid, remove dead copper, pour order 25): 950,2270 1120,2270 1150,2240 1150,2070 1130,2050 540,2050 520,2030 440,2030 430,2040 430,2110 470,2150 830,2150
GND on Bottom Layer "NONET_L-01_P-001" (solid, remove dead copper, pour order 26): 2700,5000 cw(c2700,4800) 2900,4800 2900,200 cw(c2700,200) 2700,0 300,0 cw(c300,300) 0,300 0,4800 cw(c200,4800) 200,5000
3V3_RP2CAN on Top Layer "3V3_RP2040" (solid, remove dead copper, pour order 5): 2628.9,415.63 1200.15,415.63 1200.15,1335.63 2628.9,1335.63
Solinoid_1_PWR on Top Layer "NONET_L-01_P-001" (solid, remove dead copper, pour order 12): 570,2440 530,2480 450,2480 430,2460 430,2420 470,2380 760,2380 840,2300 1050,2300 1070,2320 1070,2460 1040,2490 830.85,2490 825.85,2495 815,2495 760,2440
GND on Top Layer "NONET_L-01_P-001" (solid, remove dead copper, pour order 24): 1330,2876 1222,2984 1222,3070 1269,3117 1342,3117 1487,2972 1487,2876
12V on Top Layer "NONET_L-01_P-001" (solid, remove dead copper, pour order 9): 490,1328 528,1366 793,1366 857,1300 1050,1300 2340,2590 2340,3940 2440,4040 2800,4040 2840,4080 2840,4340 2780,4400 2570,4400 2500,4470 2440,4470 2400,4510 2400,4640 2380,4660 2220,4660 2200,4640 2200,4460 2140,4400 2060,4320 2060,2750 1740,2430 1165,2430 1165,2270 1320,2270 1380,2210 1165,2210 1165,1940 1125,1940 1125,1725 1085,1725 950,1590 490,1590 355,1455 355,1030 425,960 425,905 454.88,875 505,875 530,900 530,1015 490,1055
GND on Top Layer "NONET_L-01_P-001" (solid, remove dead copper, pour order 23): 1922,4502 1967,4457 2111,4457 2149,4495 2149,4700 2117,4732 1943,4732 1922,4711
GND on Top Layer "NONET_L-01_P-001" (solid, remove dead copper, pour order 22): 1288,4558 1366,4480 1514,4480 1534,4500 1534,4691 1497,4728 1304,4728 1288,4712
Vreg on Top Layer "NONET_L-01_P-001" (solid, remove dead copper, pour order 21): 1045,4169 1124,4090 1790,4090 1790,4440 1350,4440 1200,4590 1045,4590
Vreg on Top Layer "NONET_L-01_P-001" (solid, remove dead copper, pour order 20): 1735,3125 1335,3125 1300,3160 1300,3390 1350,3440 1735,3440
V+ on Top Layer "NONET_L-01_P-001" (solid, remove dead copper, pour order 19): 1497.87,3712.13 1530,3680 1530,3500 1490,3460 1310,3460 1250,3400 1245,3390 1245,3189 936,2880 770,2880 770,3300 770,3390 695,3465 375,3465 310,3530 310,3940 370,4000 790,4000 1077.87,3712.13
Solinoid_3_PWR on Top Layer "NONET_L-01_P-001" (solid, remove dead copper, pour order 18): 687.5,2252.5 477.5,2252.5 437.5,2212.5 437.5,2152.5 447.5,2142.5 607.5,2142.5 797.5,1952.5 812.5,1937.5 812.5,1917.5 837.5,1892.5 862.5,1892.5 912.5,1842.5 912.5,1807.5 927.5,1792.5 1067.5,1792.5 1072.5,1787.5 1102.5,1817.5 1102.5,1972.5 1047.5,2027.5 912.5,2027.5
5V on Top Layer "NONET_L-01_P-001" (solid, remove dead copper, pour order 17): 2615.03,1630 2590,1604.97 2590,1525 2615.03,1500 2615.03,1425 2675,1425 2705,1455 2705,2294.76 2649.88,2349.88 2620,2320 2525,2320 2615.03,2229.97
GND on Top Layer "NONET_L-01_P-001" (solid, remove dead copper, pour order 16): 2715,2310 2840,2310 2865,2335 2865,2435 2835,2465 2720,2465 2680,2425 2680,2345
3V3_RP2CAN on Top Layer "NONET_L-01_P-001" (solid, remove dead copper, pour order 15): 2590,1335 2715,1460 2715,1530 2720,1535 2745,1535 2755,1525 2755,1460 2855,1360 2855,1180 2617.5,942.5
5V on Top Layer "NONET_L-01_P-001" (solid, remove dead copper, pour order 3): 435,764 449,750 850,750 1010,910 1010,1025 2295,2310 2640,2310 2660,2330 2660,3048 2722,3110 2800,3110 2840,3150 2840,3350 2780,3410 2540,3410 2410,3280 2410,2640 850,1080 850,1000 695,845 457,845 435,823
Orin_PWR on Top Layer "NONET_L-01_P-001" (solid, remove dead copper, pour order 0): 755,1625 750,1620 710,1620 690,1640 690,1690 690,1780 730,1820 880,1820 1040.13,1659.87 1040.13,1556.97 1013.15,1530 850,1530
Solinoid_2_PWR on Top Layer "NONET_L-01_P-001" (solid, remove dead copper, pour order 13): 817.5,2287.5 735,2370 460,2370 430,2340 430,2300 470,2260 712.5,2260 840,2132.5 915,2057.51 1150,2057.5 1150,2240 1102.5,2287.5
Vreg on Top Layer "NONET_L-01_P-001" (solid, remove dead copper, pour order 10): 185,1795 320,1930 320,2510 40,2510 40,1090 255,875 385,875 408,898 408,937 185,1160
Vreg on Top Layer "NONET_L-01_P-001" (solid, remove dead copper, pour order 8): 2020,4370 1950,4440 1580,4440 1580,4150 1720,4010 1720,3500 1660,3440 1600,3440 1600,3240 1720,3120 1720,2710 1670,2660 160,2660 40,2540 40,2500 1770,2500 2020,2750
mOTOR_PWR on Top Layer "NONET_L-01_P-001" (solid, remove dead copper, pour order 6): 455,2985 417,3023 417,3430 740,3430 740,3010 715,2985

## Keep-outs
Bottom Layer:
  lines w10: 353.03,465 480,465 560,545 570,545 780,545 ; 437,2915 475,2915 500,2890 ; 800,800 835,800 ; 810,2875 838.13,2875 1020,3056.87 ; 880,3990 1080,3790
  lines w17: 6.87,2930 366,2930 381,2915 ; 1020,3056.87 1030,3056.87 1080,3106.87 1080,3790
Keep-Out Layer:
  region: 2901.68,337.49 cw(c2681.69,337.49) 2681.68,117.49 2556.68,117.49 2556.68,462.49 2901.68,462.49
  region: 2680,4770 cw(c2680,4550) 2900,4550 2900,4425 2555,4425 2555,4770
  region: 0,4550 cw(c220,4550) 220,4770 345,4770 345,4425 0,4425
  region: 220,120 cw(c220,340) 0,340 0,465 345,465 345,120
  lines w10: 0,452.08 0,4750 ; 244,4769 2643.88,4769 ; 2900,250 2900,4748.03

## Other copper
Top Layer:
  pour cut-out: 2076.61,934.2 2026.61,984.2 2026.61,1029.2 2116.61,1029.2 2116.61,994.2
  pour cut-out: 2166.83,1041.29 2166.61,1041.07 2166.61,824.32 2219.23,824.32 2246.55,851.64 2246.55,924.25 2261.61,939.32 2261.61,1039.32
  pour cut-out: 1736.61,418.43 1946.61,418.43 1951.61,423.43 1951.61,673.43 1811.61,673.43 1721.61,613.43
  pour cut-out: 1868.8,1054.11 1868.77,1054.15 1868.77,1074.54 1668.19,1073.42 1656.68,1061.91 1656.68,1057.26 1692.24,1057.26 1716.3,1033.2 1738.47,1033.2 1753.49,1048.22 1763.49,1048.22
  pour cut-out: 1366.04,795.58 1370.09,806.32 1370.09,839.21 1364.04,845.26 1334.04,845.26 1334.04,820.26 1344.04,810.26
  text "I hope this board works" at 1548.07,4695.86 h40

## Silkscreen, mask and mechanical layers (free items; w line width, h text height)
Top Overlay:
  drawing of 101 lines, arcs and shapes, not listed
  text "Vreg" at 568.36,4683.34 h50
  text "12V" at 1724.02,4613.01 h40
  text "GND" at 160.01,4386.12 h80 r270
  text "V+" at 160.01,3796.65 h80 r270
  text "Motor" at 1072.5,3332.49 h15 r270
  text "GND" at 972.5,3319.99 h15 r270
  text "Motor" at 1072.5,3232.49 h15 r270
  text "GND" at 972.5,3219.99 h15 r270
  text "Motor" at 1072.5,3132.49 h15 r270
  text "GND" at 972.5,3119.99 h15 r270
  text "Motor" at 1072.5,3032.49 h15 r270
  text "GND" at 972.5,3019.99 h15 r270
  text "Motor" at 43.36,2890.01 h40
  text "V+" at 86.68,2660.01 h40
  text "Sol_1" at 606.69,2553.34 h40
  text "Sol_1" at 886.67,2546.65 h20 r270
  text "Sol_2" at 886.67,2424.99 h20 r270
  text "Sol_3" at 886.67,2294.99 h20 r270
  text "Pump" at 786.67,2213.31 h40 r270
  text "Pump" at 888.34,2156.65 h20 r270
  text "Sol3" at 740.02,1996.01 h40
  text "Sol2" at 60.02,1940.01 h40
  text "5V" at 2761.68,1877.01 h40
  text "Orin" at 130.01,1599.98 h40 r270
  text "Orin" at 770,1594.99 h20 r270
  text "GND" at 670,1586.66 h20 r270
  text "12V out" at 746.71,1390.01 h40
  text "BOOT" at 1607.72,1267.94 h40 r180
  text "RESET" at 1349.98,1257.94 h30 r180
  text "GND" at 912.5,1234.99 h15 r270
  text "AUX" at 1012.5,1234.99 h15 r270
  text "Kill" at 1012.5,1137.49 h15 r270
  text "GND" at 912.5,1134.99 h15 r270
  text "Vreg" at 595,902.49 h15 r270
  text "12V" at 692.5,893.74 h15 r270
  text "GND" at 592.5,794.99 h15 r270
  text "5V" at 692.5,787.5 h15 r270
  text "CANL" at 592.5,702.49 h15 r270
  text "CANH" at 692.5,702.49 h15 r270
  text "TERM / ON" at 1163.9,623.43 h40 r180
  text "3V3" at 2412.68,330.01 h40
Bottom Overlay:
  drawing of 50 lines, arcs and shapes, not listed
  text "TALOS" at 2231.69,3632.07 h100 r90
  text "Lil' Tank the first" at 2347.31,3193.81 h100 r90
  text "PoHalf" at 2840,2255 h60 r90
  text "The Underwater Robotics Team" at 2700,2240 h60 r90
  text "Sens" at 1315,246.65 h20 r90
  text "GND" at 1170,236.66 h20 r90
  text "5V" at 1245,226.66 h20 r90
Top Solder:
  text "I hope this board works" at 1548.07,4695.86 h40

## Text inside footprints (layer, text, board x,y; h text height)
U1: Top Overlay "*" at 847,2945.5 h50 r270; Mechanical 13 "*" at 798.5,2904.5 h50 r270
U2: Top Overlay "*" at 617,2945.5 h50 r270; Mechanical 13 "*" at 568.5,2904.5 h50 r270
U3: Top Overlay "*" at 1342.6,2685.5 h50 r90; Mechanical 13 "*" at 1387,2734 h50 r90
U7: Top Overlay "*" at 1052.5,3585 h50; Mechanical 13 "*" at 1177.5,3719 h50